# Altium PCB BB_BTN_TACT.PcbDoc
Units mm, origin at the board's own origin, x right, y up, seen from the top; angles counter-clockwise.
Board outline 20.5 x 14 mm, 2 copper layers (Top Layer, Bottom Layer); 9 components, 5 nets, 20 pads, 0 vias.
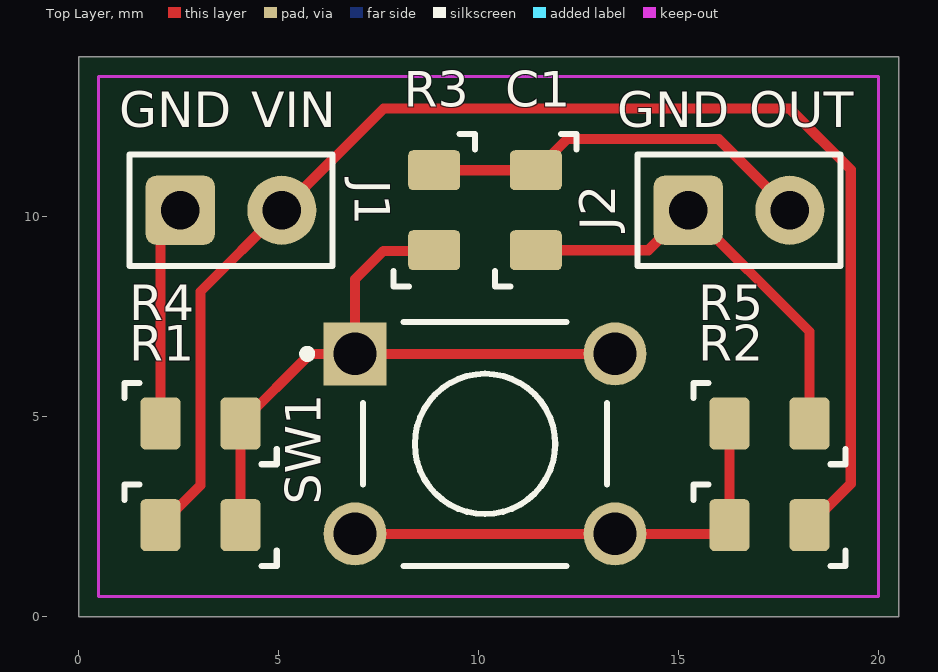
[diagram p0: Top Layer view]
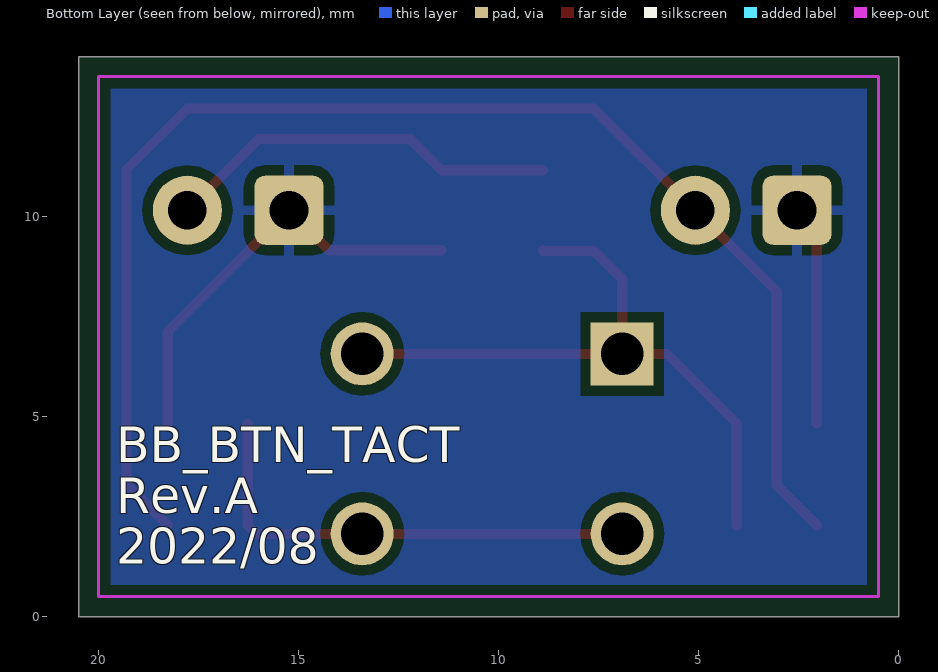
[diagram p1: Bottom Layer view, seen from below]
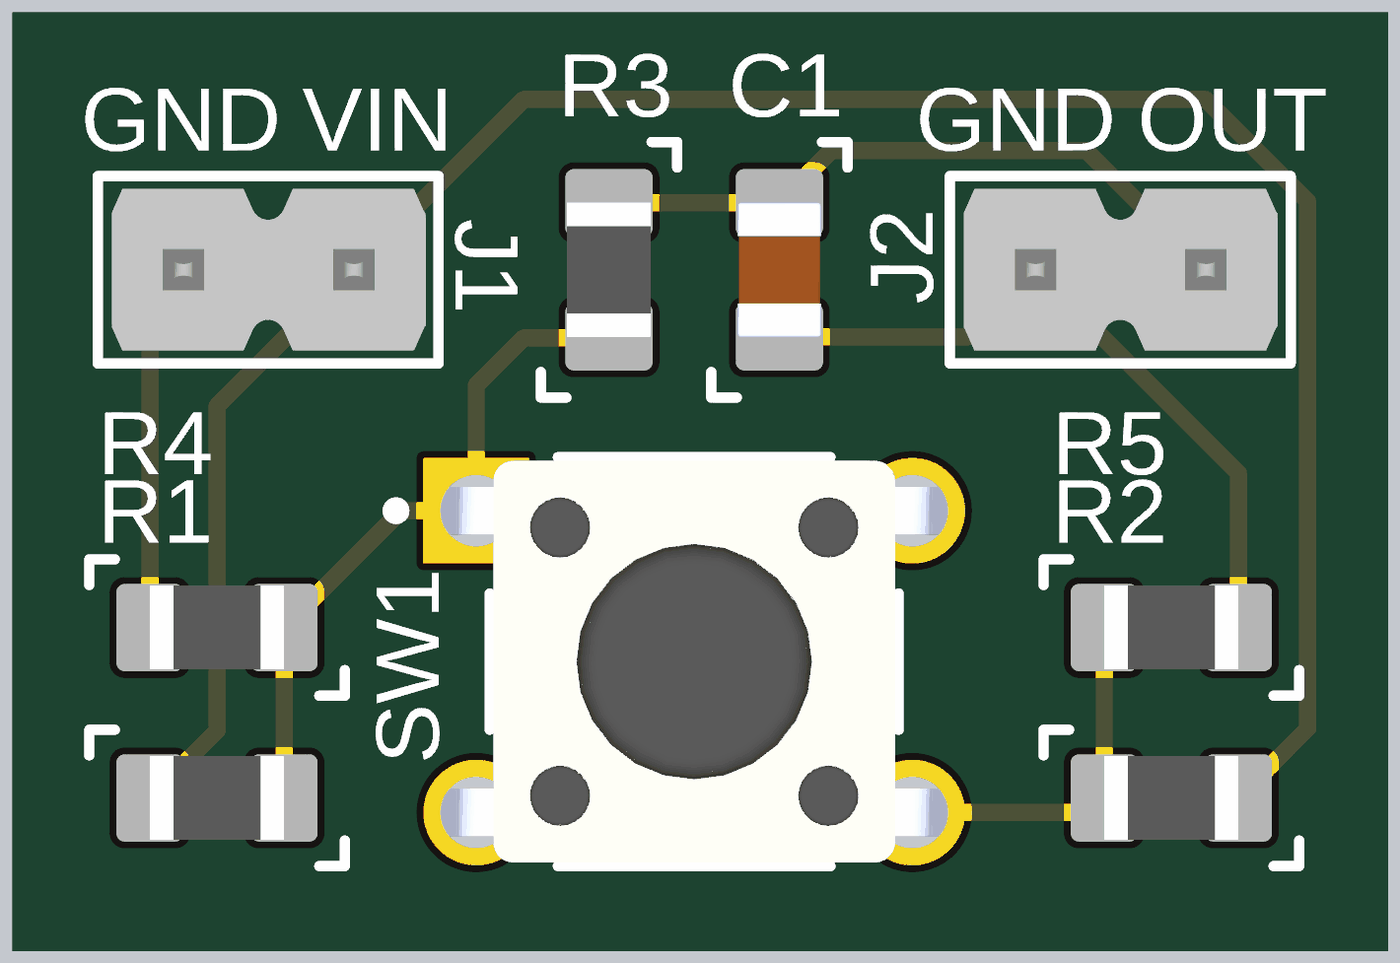
[diagram p2: 3D render of the assembled board from above, using the file's embedded part models]

## Layer stack, top to bottom
Top Solder: solder mask 0.0102, Solder Resist, Dk 3.5
Top Layer: signal copper 0.0356
Dielectric 1: dielectric 0.32, FR-4, Dk 4.8
Bottom Layer: signal copper 0.0356
Bottom Solder: solder mask 0.0102, Solder Resist, Dk 3.5

## Board outline
0,0 0,14 20.5,14 20.5,0

## Design rules (kind name [scope] priority, off if disabled: settings)
Clearance [All] p1: gap=0.254 ignorepadtopadclearanceinfootprint=FALSE except(0: Arc-Hole Track-Hole SMDPad-Hole THPad-Hole Via-Hole Fill-Hole Poly-Hole Region-Hole Text-Hole)
PolygonConnect [All] p1: connectstyle=Relief reliefconductorwidth=0.254 reliefentries=4 polygonreliefangle="90 Angle" airgapwidth=0.254
RoutingVias [All] p1: holewidth=0.711 width=1.27 viastyle="Through Hole" minholewidth=0.711 minwidth=1.27 maxholewidth=0.711 maxwidth=1.27
SolderMaskExpansion [All] p1: expansion=0.102
Width [All] p1: maxlimit=0.254 minlimit=0.254 preferedwidth=0.254
30 further rules are at their usual default settings.

## Components (designator, comment, footprint, x,y, rotation, side; value= is the part's Value field where it differs from the comment)
C1 "? F" 0805C_RF_M 11.43,10.16 r90 top
J1 "PINHDR-2P1" HEADER-2.54-2P1 3.81,10.16 r0 top
J2 "PINHDR-2P1" HEADER-2.54-2P1 16.51,10.16 r0 top
R1 "? R" 0805R_RF_M 3.048,2.286 r180 top
R2 "? R" 0805R_RF_M 17.272,2.286 r0 top
R3 "? R" 0805R_RF_M 8.89,10.16 r90 top
R4 "? R" 0805R_RF_M 3.048,4.826 r180 top
R5 "? R" 0805R_RF_M 17.272,4.826 r0 top
SW1 "BTN-SPST-NO-4C" TE_CONN_1825910-6-4 10.16,4.318 r0 top

## Footprints (in the part's own frame and the unit in brackets; to place one, negate y for a bottom-side part, rotate by r counter-clockwise, add the part's x,y. Pads: shape width x height; smd on the part's side, far side on the other; paste and mask are expansions set on the pad)
0805C_RF_M [mm] "Chip Capacitor 0805 Reflow Medium"
  rrect25% 1x1.3 smd: 1(-1,0) 2(1,0)
  silkscreen extent -1.91,-1.02 1.91,1.02, body extent -1,-0.62 1.01,0.63, height 0.94
0805R_RF_M [mm] "Chip Resistor 0805 Reflow Medium"
  rrect25% 1x1.3 smd: 1(-1,0) 2(1,0)
  silkscreen extent -1.91,-1.02 1.91,1.02, body extent -1,-0.62 1,0.63, height 0.6
HEADER-2.54-2P1 [mil] "Pin Header Single Row 2 Positions Pitch 2.54 mm"
  rrect30% 68x68 hole 38: 1(-50,0)
  round 68 hole 38: 2(50,0)
  silkscreen extent -100,-55 100,55, body extent -92,-47 92,47, height 330
TE_CONN_1825910-6-4 [mil] "Switch Push Button OFF (ON) SPST Round Button 0.05A 24VDC Momentary Contact PC Pins Thru-Hole"
  rect 62x62 hole 42: 1(-127.95,88.58)
  round 62 hole 42: 2(127.95,88.58) 3(-127.95,-88.58) 4(127.95,-88.58)
  silkscreen extent -179,-120 120,120, body extent -153,-118 154,118, height 198

## Part data
C1: library part C, "Capacitor", Manufacturer="Generic Brand", Max Voltage="? V", Tolerance=?, Category=Capacitor, Mounting Technology=SMT, Supplier Link=http://
J1 J2: "Pin Header Single Row 2 Positions", Mounting Technology=THT
R1 R2 R3 R4 R5: library part R, "Resistor", Manufacturer="Generic Brand", Max Voltage="? V", Power Rating="? W", Tolerance=?, Category=Resistor, Mounting Technology=SMT, Supplier Link=http://
SW1: "Tactile Switch SPST-NO", Manufacturer="Generic Brand", Category="Tactile Button", Mounting Technology=THT, Supplier Link=http://

## Nets (pads, with @x,y where several pads share a name; then routed paths per layer and width w, separated by ;. In a path a pad name is that pad's centre, name@x,y a point inside that pad or via, vN(x,y) a via of type N, cw(c..) or ccw(c..) an arc to the next point about the centre after c; other vN are vias at no path point)
BTN_1: C1.2 J2.2 R3.2 | length 9.9
  Top Layer w0.254: R3.2 C1.2 12.208,11.938 16.002,11.938 J2.2
GND: C1.1 J1.1 J2.1 R4.2 R5.2 | length 16.4
  Top Layer w0.254: R4.2 2.048,9.668 J1.1 ; C1.1 14.24,9.16 J2.1 18.272,7.128 R5.2
NetR1_1: R1.1 R3.1 R4.1 SW1.1 SW1.2 | length 16.8
  Top Layer w0.254: R1.1 R4.1 5.79,6.568 SW1.1 ; R3.1 8.874,9.144 7.62,9.144 6.91,8.434 SW1.1 ; SW1.2 SW1.1
NetR2_1: R2.1 R5.1 SW1.3 SW1.4 | length 12
  Top Layer w0.254: SW1.3 SW1.4 16.054,2.068 R2.1 R5.1
VCC: J1.2 R1.2 R2.2 | length 34.4
  Top Layer w0.254: R1.2 3.048,3.286 3.048,8.128 J1.2 7.62,12.7 17.78,12.7 19.304,11.176 19.304,3.318 R2.2

## Polygon pours and split planes (outlines as drawn)
GND on Bottom Layer "NONET_L-01_P-001" (solid, remove dead copper, pour order 0): 0.5,13.5 20.5,13.5 20.5,0.5 0.5,0.5

## Keep-outs
Keep-Out Layer:
  lines w0.076: 0.5,0.5 0.5,13.5 20,13.5 20,0.5 0.5,0.5

## Silkscreen, mask and mechanical layers (free items; w line width, h text height)
Top Overlay:
  text "GND" at 1.016,11.938 h1.52
  text "VIN" at 4.318,11.938 h1.52
  text "GND" at 13.462,11.938 h1.52
  text "OUT" at 16.764,11.938 h1.52
Bottom Overlay:
  text "BB_BTN_TACT" at 19.558,3.556 h1.52
  text "Rev.A" at 19.558,2.286 h1.52
  text "2022/08" at 19.558,1.016 h1.52
Mechanical 1:
  the board outline again, w0.127